# Altium PCB PCB1.PcbDoc
Units mm, origin at the board's own origin, x right, y up, seen from the top; angles counter-clockwise.
Board outline 223.9 x 171.83 mm, 2 copper layers (Top Layer, Bottom Layer); 83 components, 69 nets, 300 pads, 23 vias.
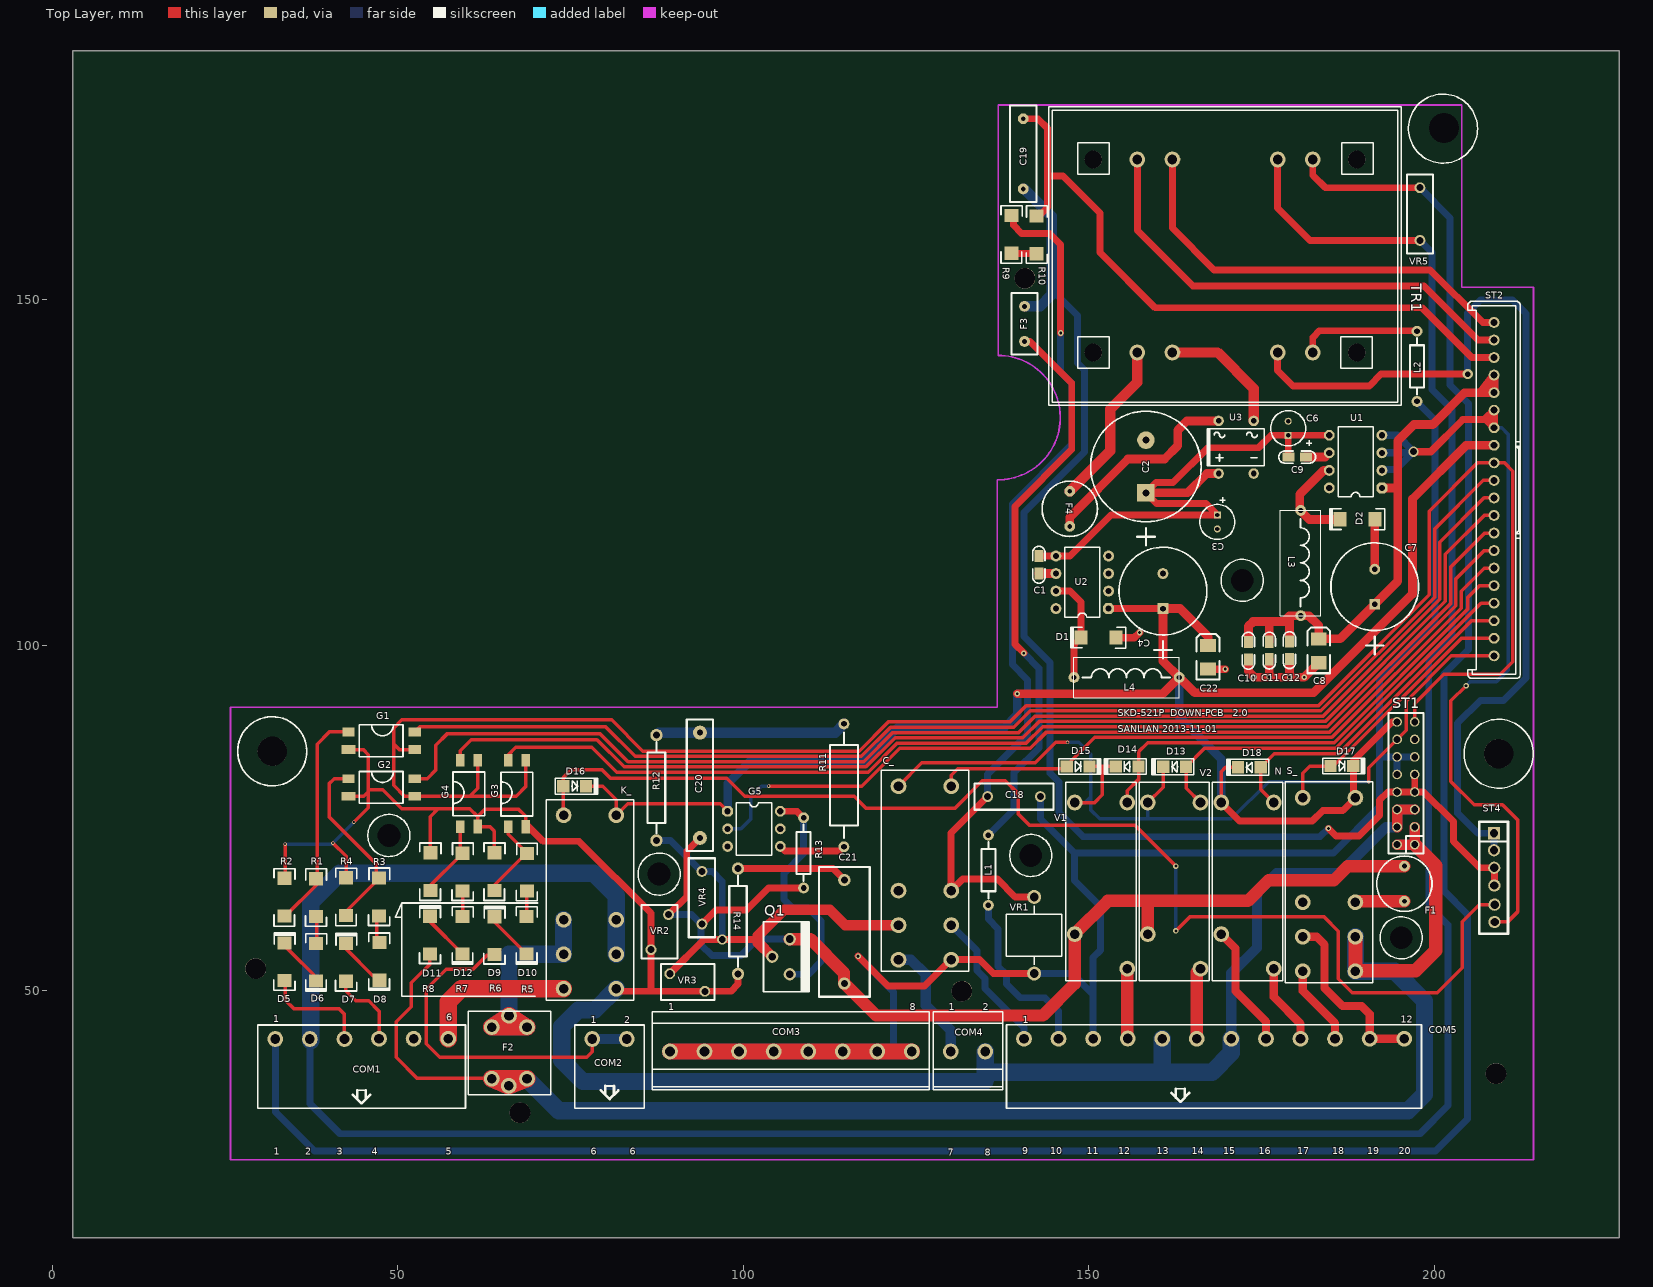
[diagram p0: Top Layer view]
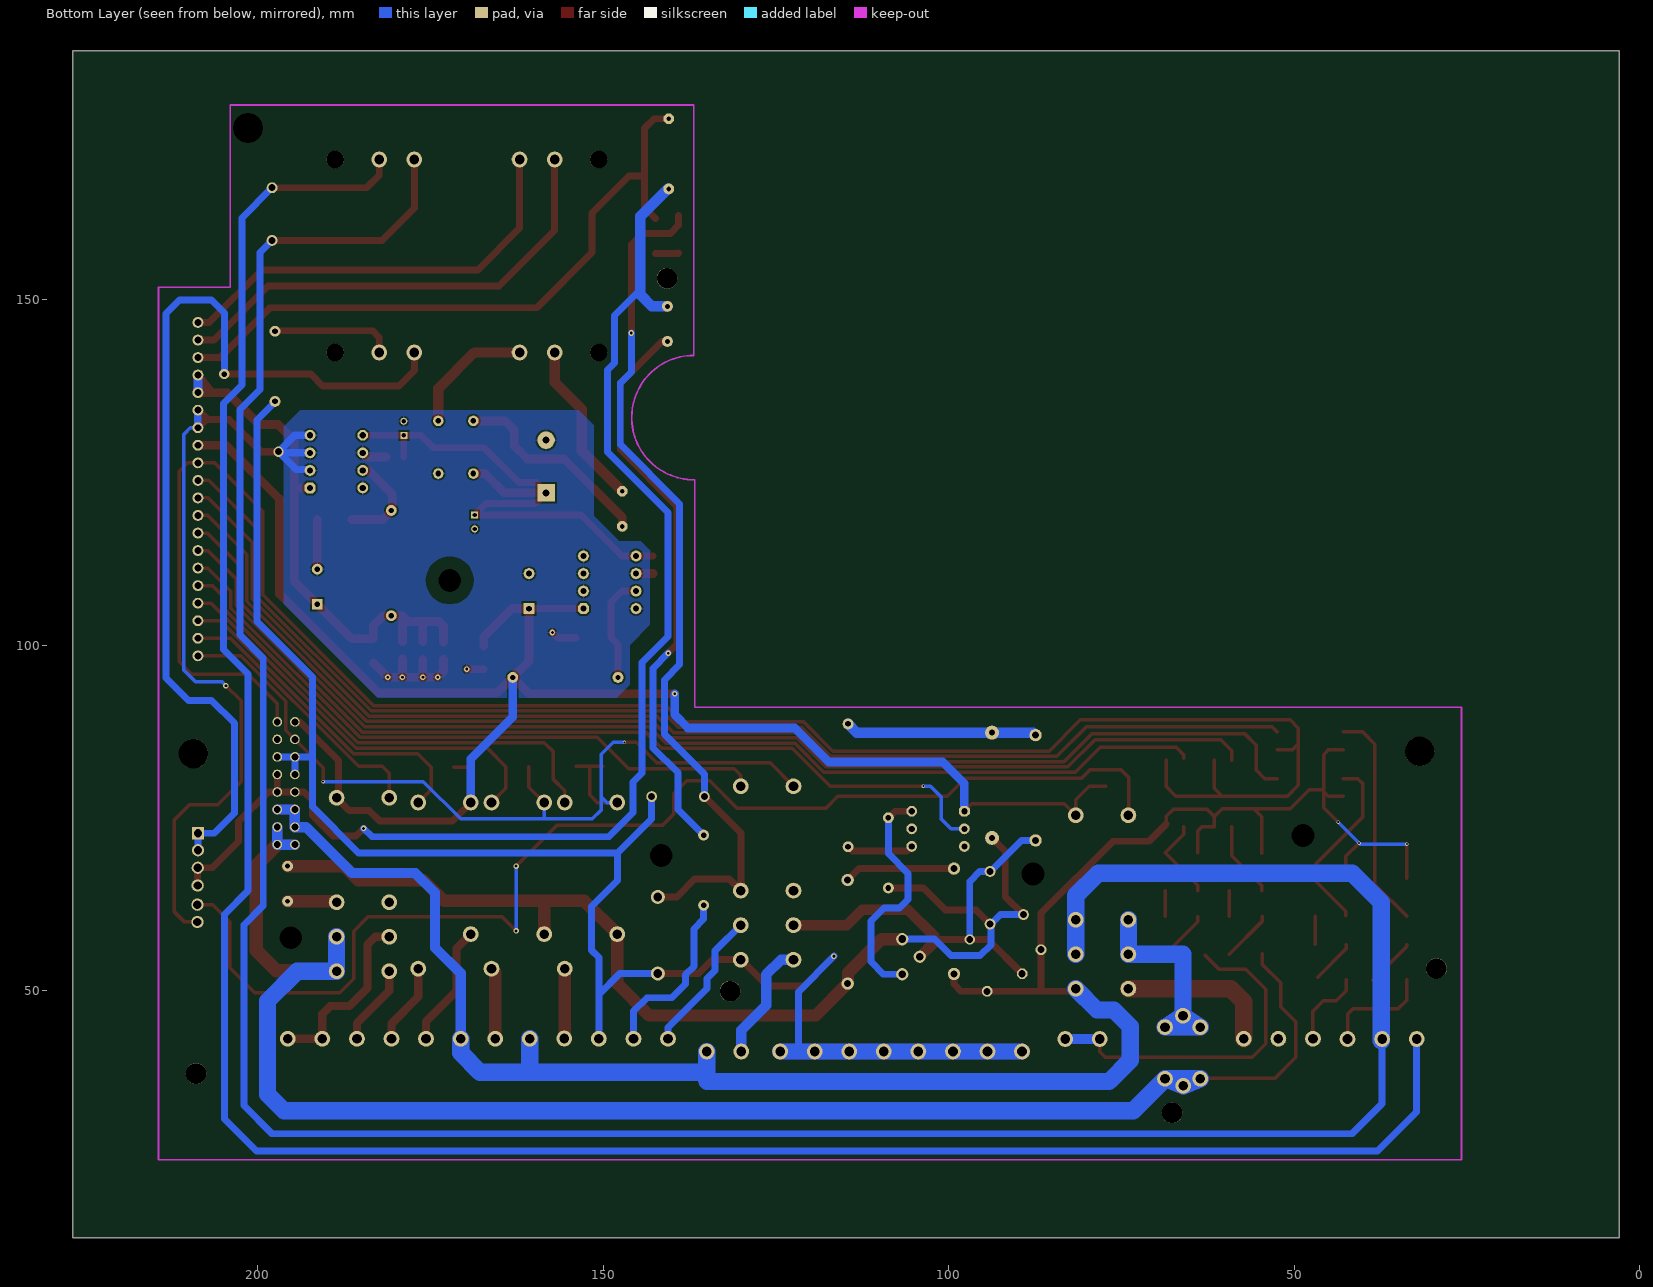
[diagram p1: Bottom Layer view, seen from below]

## Layer stack, top to bottom
Top Layer: signal copper 0.0356
Dielectric: dielectric 0.32, FR-4, Dk 4.8
Bottom Layer: signal copper 0.0356

## Board outline
226.822,186.055 226.822,14.224 2.921,14.224 2.921,186.055 226.822,186.055

## Design rules (kind name [scope] priority, off if disabled: settings)
Clearance [All] p1: gap=0.254
ComponentClearance [All] p1: gap=0.254 collisioncheckmode=3 verticalgap=0.254
HoleSize [All] p1: absolutevalues=TRUE maxlimit=6.54 minlimit=0.3 maxpercent=80.000 minpercent=20.000
PolygonConnect [All] p1: connectstyle=Relief reliefconductorwidth=0.254 reliefentries=4 polygonreliefangle="90 Angle"
RoutingVias [All] p1: holewidth=6.711 width=1.27 viastyle="Through Hole" minholewidth=0.3 minwidth=0.5 maxholewidth=6 maxwidth=6
SolderMaskExpansion [All] p1: expansion=0.102
TestPointUsage [All] p1: valid=0 allowmultiple=FALSE
Testpoint [All] p1: side=15 testpointundercomponent=TRUE minsize=1.016 maxsize=2.54 preferedsize=1.524 minholesize=0 maxholesize=1.016 preferedholesize=0.813 testpointgrid=0.025 style=1023 order=0123456789
Width [All] p1: maxlimit=6.254 minlimit=0.254 preferedwidth=0.254
17 further rules are at their usual default settings.

## Components (designator, comment, footprint, x,y, rotation, side; value= is the part's Value field where it differs from the comment)
C1 "104" 0805-B 142.799,112.903 r270 top
C2 "1000uF/50V" "RB.3/.6 - 16×25" 158.293,122.047 r270 top
C3 "22uF/63V" RB.1/.2-5*5 168.631,118.847 r270 top
C4 "220uF/63V" "RB.2/.4 - 12.5×25" 160.757,105.283 r270 top
C6 "22uF/63V" RB.1/.2-5*5 178.892,130.378 r90 top
C7 "470uF/35V" "RB.2/.4 - 12.5×25" 191.414,105.918 r270 top
C8 "10uF/25V" CT 183.363,99.212 r90 top
C9 "104" 0805-b 178.918,127.229 r0 top
C10 "104" 0805-b 173.126,100.457 r270 top
C11 "104" 0805-b 176.149,100.482 r270 top
C12 "104" 0805-b 179.07,100.533 r270 top
C18 "0.47nF/440V" RAD0.3 135.382,78.08 r0 top
C19 "33nF/400V" RAD0.4 140.538,176.2 r270 top
C20 "10nF/305V~" RAD0.6 93.726,87.325 r270 top
C21 "150nF/630V" RAD-0.47/250V 114.63,65.989 r270 top
C22 "10uF/25V" CT 167.335,98.298 r90 top
C_ "RT424012" RT424012 122.479,79.578 r270 top
COM1 "MDSTB 2.5/6-G" "MDSTB 2.5/6-G" 29.743,52.984 r0 top
COM2 "MSTB 2.5/2-G" "MSTB 2.5/2-G" 78.13,42.977 r0 top
COM3 "MKDS 3/2 (4只2位拼接)" "MKDS 3/8" 89.383,41.173 r0 top
COM4 "MKDS 3/2" "MKDS 3/2" 130.023,41.173 r0 top
COM5 "MSTB 2.5/12-G" "MSTB 2.5/12-G" 140.64,43.002 r0 top
D1 "1N5819" XD 151.359,101.092 r180 top
D2 "1N5819" XD 188.849,118.237 r180 top
D5 "GP10Y" XXD 33.579,54.178 r90 top
D6 "BZY97C100GP" XXD 38.151,54.077 r270 top
D7 "GP10Y" XXD 42.52,54.077 r90 top
D8 "BZY97C100GP" XXD 47.295,54.204 r270 top
D9 "GP10Y" XXD 63.983,57.963 r90 top
D10 "BZY97C100GP" XXD 68.631,57.988 r270 top
D11 "GP10Y" XXD 54.661,58.039 r90 top
D12 "BZY97C100GP" XXD 59.36,57.988 r270 top
D13 "FR107" D 162.535,82.372 r0 top
D14 "FR107" D 155.651,82.398 r0 top
D15 "FR107" D 148.387,82.448 r180 top
D16 "FR107" D 75.514,79.604 r180 top
D17 "FR107" D 186.588,82.525 r180 top
D18 "FR107" D 173.355,82.296 r0 top
F1 "5A/250V" RAD0.2 195.707,62.916 r90 top
F2 "3.5A/250V" FUSE_FPG4 63.602,44.704 r0 top
F3 "PTC C886" RAD0.2 140.716,143.967 r90 top
F4 "MST.630mA/250V" RAD0.2 147.269,117.196 r90 top
G1 "SFH615A-3" GG 47.676,86.157 r270 top
G2 "SFH615A-3" GG 47.676,79.4 r270 top
G3 "SFH615A-3" GG 67.234,78.537 r0 top
G4 "SFH615A-3" GG 60.274,78.562 r0 top
G5 "BRT12-H" DIP-6 97.739,75.946 r0 top
K_ "RT424012" RT424012 73.99,75.362 r270 top
L1 "5.6uH" AXIAL0.4 135.484,62.332 r90 top
L2 "5.6uH" AXIAL0.4 197.536,135.28 r90 top
L3 "330uH" LR 180.696,111.887 r270 top
L4 "1mH" LR 155.499,95.326 r0 top
N "V23061-A1005-A302" V23061-A1005-A302 169.189,77.216 r270 top
Q1 "BTB12-800CW" TO-220F 106.731,54.889 r270 top
R1 "33K/0.5W" TTR 38.151,63.449 r90 top
R2 "1K" TTR 33.553,63.5 r270 top
R3 "33K/0.5W" TTR 47.295,63.551 r90 top
R4 "1K" TTR 42.494,63.576 r270 top
R5 "33K/0.5W" TTR 68.682,67.132 r90 top
R6 "1K" TTR 63.957,67.208 r270 top
R7 "33K/0.5W" TTR 59.385,67.158 r90 top
R8 "1K" TTR 54.686,67.208 r270 top
R9 "470K" TTR 138.836,159.461 r270 top
R10 "470K" TTR 142.494,159.41 r90 top
R11 "820R/3W" AXIAL0.7 114.579,88.595 r270 top
R12 "220R/2W" AXIAL0.6 87.427,71.73 r90 top
R13 "1K" R 108.737,69.926 r180 top
R14 "680R/3W" AXIAL0.6 99.238,67.64 r270 top
S_ "RT424012" RT424012 181,77.902 r270 top
ST1 "CON16" IDC16-A 197.206,71.12 r90 top
ST2 "CON20" STOCKO20V 208.686,100.482 r270 top
ST4 "CON6" 2.54-6 208.407,68.478 r270 top
TR1 "TRANS10" T15-F131 182.448,170.307 r0 top
U1 "LM2574N-3.3" DIP-8 192.456,122.758 r180 top
U2 "LM2574N-12" DIP-8 152.883,105.283 r180 top
U3 "DF10M" BRIGDE_RECTIFIER 168.808,132.461 r0 top
V1 "V23061-A1005-A302" V23061-A1005-A302 147.98,77.216 r270 top
V2 "V23061-A1005-A302" V23061-A1005-A302 158.572,77.216 r270 top
VR1 "EF2500X" EF2500X 142.113,63.551 r270 top
VR2 "7M/250V~" 07K275 87.909,58.445 r270 top
VR3 "7M/250V~" 07K275 91.897,51.156 r180 top
VR4 "10M/240V~" RAD0.3 94.005,59.614 r90 top
VR5 "10M/250V~" RAD0.3 197.968,158.598 r90 top

## Footprints (in the part's own frame and the unit in brackets; to place one, negate y for a bottom-side part, rotate by r counter-clockwise, add the part's x,y. Pads: shape width x height; smd on the part's side, far side on the other; paste and mask are expansions set on the pad)
2.54-6 [mil]
  rect 70x70 hole 48: 1(-169,11)
  round 70 hole 48: 2(-72,11) 3(28,12) 4(129,13) 5(238,14) 6(337,14)
  silkscreen extent -234,-74 405,93
07K275 [mil]
  round 62 hole 40: 1(-100,50) 2(100,-50)
  silkscreen extent -155,-105 150,100
0805-B [mil]
  rect 70x50 smd: 1(0,0) 2(100,0)
  silkscreen extent -55,-35 155,35
0805-b [mil]
  rect 70x50 smd: 1(0,0) 2(100,0)
  silkscreen extent -55,-35 155,35
AXIAL0.4 [mil]
  round 62 hole 32: 1(0,0) 2(400,0)
  silkscreen extent 40,-40 360,40
AXIAL0.6 [mil]
  round 70 hole 40: 1(0,0) 2(600,0)
  silkscreen extent 40,-50 560,50
AXIAL0.7 [mil]
  round 62 hole 32: 1(0,0) 2(700,0)
  silkscreen extent 50,-80 650,80
BRIGDE_RECTIFIER [mil]
  round 60 hole 32: 1(0,0) 2(0,-300) 3(200,0) 4(200,-300)
  silkscreen extent -65,-255 260,-45
CT [mil]
  rect 75x90 smd: 1(65.6,2.23) 2(-69.4,2.23)
  silkscreen extent -129,-63 131,67
D [mil]
  rect 70x70 smd: 1(61.81,0.74) 2(-68.19,0.74)
  silkscreen extent -133,-44 107,46
DIP-6 [mil]
  oct 62x62 hole 35: 1(0,0)
  round 62 hole 35: 2(0,-100) 3(0,-200) 4(300,-200) 5(300,-100) 6(300,0)
  silkscreen extent 50,-250 250,50
DIP-8 [mil]
  oct 62x62 hole 35: 1(0,0)
  round 62 hole 35: 2(0,-100) 3(0,-200) 4(0,-300) 5(300,-300) 6(300,-200) 7(300,-100) 8(300,0)
  silkscreen extent 50,-350 250,50
EF2500X [mil]
  round 80 hole 50: 1(0,0) 2(437,0)
  silkscreen extent 50,-158 386,158
FUSE_FPG4 [mil]
  round 90 hole 55: 1(0,0) 1(200,0) 2(0,-295) 2(200,-295)
  silkscreen extent -135,-385 335,90
GG [mm]
  rect 1.25x1.8 smd: 1(-1.27,-4.826) 3(1.27,4.774) 4(-1.27,4.774)
  rect 1.25x2 smd: 2(1.27,-4.826)
  silkscreen extent -2.3,-3.28 2.3,3.07
IDC16-A [mil]
  round 55 hole 39.37: 1(0,0) 2(0,100) 3(100,0) 4(100,100) 5(200,0) 6(200,100) 7(300,0) 8(300,100) 9(400,0) 10(400,100) 11(500,0) 12(500,100) 13(600,0) 14(600,100) 15(700,0) 16(700,100)
  silkscreen extent -50,-50 750,150
LR [mil]
  round 62 hole 30: 1(-300,0) 2(300,0)
  silkscreen extent -300,-115 300,115
"MDSTB 2.5/6-G" [mil]
  round 90 hole 55: 1(99,-394) 2(296,-394) 3(493,-394) 4(690,-392) 5(887,-393) 6(1084,-393)
  silkscreen extent -1,-789 1183,-314
"MKDS 3/2" [mil]
  round 90 hole 55: 1(0,0) 2(197,0)
  silkscreen extent -100,-217 296,225
"MKDS 3/8" [mil]
  round 90 hole 55: 1(0,0) 2(197,0) 3(394,0) 4(591,0) 5(788,0) 6(985,0) 7(1182,0) 8(1379,0)
  silkscreen extent -100,-217 1478,225
"MSTB 2.5/2-G" [mil]
  round 90 hole 55: 1(0,0) 2(197,0)
  silkscreen extent -100,-394 296,80
"MSTB 2.5/12-G" [mil]
  round 90 hole 55: 1(0,0) 2(197,0) 3(394,0) 4(591,2) 5(788,1) 6(985,1) 7(1182,0) 8(1379,0) 9(1576,0) 10(1773,0) 11(1970,0) 12(2167,0)
  silkscreen extent -100,-395 2265,80
R [mil]
  round 62 hole 32: 1(0,-200) 2(0,200)
  silkscreen extent -40,-160 40,160
RAD0.2 [mil]
  round 62 hole 28: 1(0,0) 2(200,0)
  silkscreen extent -57,-157 257,157
RAD0.3 [mil]
  round 62 hole 40: 1(0,0) 2(300,0)
  silkscreen extent -75,-75 375,75
RAD0.4 [mil]
  round 62 hole 28: 1(0,0) 2(400,0)
  silkscreen extent -75,-75 475,75
RAD0.6 [mil]
  round 80 hole 35: 1(0,0) 2(600,0)
  silkscreen extent -75,-75 675,75
RAD-0.47/250V [mil]
  round 70 hole 40: 1(0,0) 2(590,0)
  silkscreen extent -75,-145 665,145
RB.1/.2-5*5 [mil]
  rect 40x40 hole 25: 1(0,0)
  round 40 hole 25: 2(80,0)
  silkscreen extent -100,-100 140,100
"RB.2/.4 - 12.5×25" [mil]
  rect 62x62 hole 32: 1(0,0)
  round 62 hole 32: 2(-200,0)
  silkscreen extent -350,-250 285,250
"RB.3/.6 - 16×25" [mil]
  rect 100x100 hole 40: 1(0,0)
  round 100 hole 40: 2(-300,0)
  silkscreen extent -465,-315 300,315
RT424012 [mil]
  round 90 hole 55: 11(791.85,0) 12(595,0) 14(988.7,0) 21(791.85,300) 22(595,300) 24(988.7,300) A1(0,0) A2(0,300)
  silkscreen extent -90,-100 1055,400
STOCKO20V [mil]
  round 62 hole 39.37: 1(-1820,0) 2(-1720,0) 3(-1620,0) 4(-1520,0) 5(-1420,0) 6(-1320,0) 7(-1220,0) 8(-1120,0) 9(-1020,0) 10(-920,0) 11(-820,0) 12(-720,0) 13(-620,0) 14(-520,0) 15(-420,0) 16(-320,0) 17(-220,0) 18(-120,0) 19(-20,0) 20(80,0)
  silkscreen extent -1941,-150 209,150
T15-F131 [mil]
  round 100 hole 100 unplated: 0(-1250,-1100) 0(-1250,0) 0(250,-1100) 0(250,0)
  round 90 hole 55: 1(0,0) 3(-1000,0) 4(-800,0) 6(-200,0) 7(-1000,-1100) 8(-800,-1100) 11(-200,-1100) 12(0,-1100)
  silkscreen extent -1505,-1400 505,300
TO-220F [mil]
  round 70 hole 45: 1(-100,0) 2(0,-100) 3(100,0)
  silkscreen extent -200,-150 200,110
TTR [mil]
  rect 75x80 smd: 1(-107.93,0.6) 2(107.07,0.6)
  silkscreen extent -163,-59 165,61
V23061-A1005-A302 [mil]
  round 90 hole 55: 11(750,0) 14(946.85,300) A1(0,0) A2(0,300)
  silkscreen extent -115,-50 1015,350
XD [mil]
  rect 75x80 smd: 1(-102.94,0.6) 2(97.07,0.6)
  silkscreen extent -158,-59 155,61
XXD [mil]
  rect 75x80 smd: 1(-107.93,0.6) 2(107.07,0.6)
  silkscreen extent -163,-59 165,61

## Part data
C8 C22: library part ELECTRO1, "Electrolytic Capacitor"
C9 C10 C11 C12: library part CAP, "Capacitor"
D1 D2: library part "DIODE SCHOTTKY", "Schottky Diode"
D5 D7 D9 D11 D13 D14 D15 D16 D17 D18: library part DIODE, "Diode"
D6 D8 D10 D12: library part ZENER3, "Zener Diode"
L3 L4: library part INDUCTOR
Q1: library part TRIAC
R1 R2 R3 R4 R5 R6 R7 R8 R9 R10 R13: library part RES2

## Free pads (board coordinates)
  round 2.286 hole 1.397: 0(66.091,46.355) 1(66.04,36.195)
  round 3 hole 3: ""(29.413,53.162) ""(67.666,32.283) ""(131.648,49.911) ""(140.767,153.111) ""(208.966,37.948)
  round 4.2 hole 4.3: ""(31.801,84.633) ""(201.447,174.854) ""(209.351,84.282)
  round 2.3 hole 3.3: ""(48.692,72.441) ""(87.808,66.853) ""(141.63,69.545) ""(172.237,109.372) ""(195.25,57.633)

## Via types
v1: diameter 0.8, hole 0.4, Top Layer to Bottom Layer, 13 vias
v2: diameter 0.5, hole 0.3, Top Layer to Bottom Layer, 6 vias
v3: diameter 1.5, hole 1, Top Layer to Bottom Layer, 2 vias
v4: diameter 1.5, hole 0.8, Top Layer to Bottom Layer, 1 vias
v5: diameter 0.8, hole 0.5, Top Layer to Bottom Layer, 1 vias

## Nets (pads, with @x,y where several pads share a name; then routed paths per layer and width w, separated by ;. In a path a pad name is that pad's centre, name@x,y a point inside that pad or via, vN(x,y) a via of type N, cw(c..) or ccw(c..) an arc to the next point about the centre after c; other vN are vias at no path point)
3.3V: C7.1 C8.1 C10.1 C11.1 C12.1 L3.2 ST2.4 ST2.5 U1.1 | length 86.1
  Top Layer w1.27: C10.1 173.126,102.718 173.812,103.403 178.206,103.403 179.07,104.267 ; C11.1 176.149,103.073 ; C12.1 179.07,104.267 ; U1.1 194.742,122.758 ; 206.791,136.621 ST2.4 ST2.5 ; 207.01,136.906 ST2.5 ; 179.07,104.267 181.889,104.267 183.306,102.85 183.306,100.94 186.436,100.94 194.742,109.245 194.742,129.591 197.079,131.928 199.796,131.928 204.419,136.55 ST2.5
  Bottom Layer w1.27: ST2.5 ST2.4
12V: C4.1 C22.1 D16.2 D17.2 D18.2 G5.1 K_.A2 L4.2 N.A1 S_.A2 ST1.16 ST2.8 U2.1 | length 264.1
  Top Layer w0.508: D16.2 79.648,79.585 81.61,77.622 K_.A2 83.287,77.038 96.647,77.038 G5.1 ; N.A1 169.189,81.686 169.818,82.315 D18.2 ; S_.A2@188.32,78.202 S_.A2
  Top Layer w1: U2.1 C4.1 ; N.A1 171.856,74.549 182.372,74.549 183.896,76.073 186.792,76.073 S_.A2 ; S_.A2@188.32,78.202 188.32,83.317 193.904,88.9 ST1.16
  Top Layer w1.27: v1(139.675,92.964) 160.731,92.964 L4.2@163.119,95.352 ; C22.1@167.329,99.822 167.329,101.225 163.271,105.283 C4.1 160.757,97.688 L4.2 L4.2@163.119,95.352 ; ST2.8 204.648,128.93 196.875,121.158 196.875,107.417 182.55,93.091 165.379,93.091 L4.2@163.119,95.352
  Bottom Layer w1.27: G5.1 97.739,79.959 100.863,83.083 117.348,83.083 122.276,88.011 137.744,88.011 139.675,89.941 v1(139.675,92.964) ; L4.2 163.119,89.586 169.189,83.515 N.A1
21V: C1.1 C2.1 C3.1 C6.1 C9.1 U1.5 U2.5 U3.2 | length 84.7
  Top Layer w1: C1.1 147.32,112.903 153.264,118.847 C3.1 166.98,120.498 159.842,120.498 C2.1 159.766,123.52 162.23,123.52 167.284,128.575 174.574,128.575 176.378,130.378 U1.5 ; C9.1@178.892,127.254 C6.1
  Top Layer w1.27: C2.1 164.338,122.047 167.132,124.841 U3.2
230L: ST4.1 ST4.2 TR1.11 | length 137.9
  Top Layer w1: TR1.11 177.368,139.751 179.578,137.541 190.627,137.541 192.329,139.243 v4(204.876,139.243)
  Bottom Layer w1: v4@204.851,139.268 204.851,148.082 206.705,149.936 211.379,149.936 213.335,147.98 213.335,95.25 210.083,91.999 206.731,91.999 203.429,88.697 203.429,75.667 206.324,72.771 ST4.1 ST4.2
AC24L: ST2.2 TR1.3 | length 68.5
  Top Layer w1: TR1.3 157.048,160.045 165.075,152.019 198.552,152.019 206.4,144.17 ST2.2
AC24N: ST2.1 TR1.4 | length 62.1
  Top Layer w1: TR1.4 162.128,160.376 168.173,154.33 199.441,154.33 207.061,146.71 ST2.1
AC220_L: COM1.1 TR1.1 VR5.2 | length 346.5
  Top Layer w1: TR1.1 182.448,168.021 184.252,166.218 VR5.2
  Bottom Layer w1: COM1.1 32.258,32.436 37.922,26.772 200.228,26.772 204.826,31.369 204.826,61.036 201.422,64.44 201.422,95.809 204.978,99.365 204.978,135.001 202.336,137.643 202.336,161.849 VR5.2
AC220_L_P: D11.1 F2.2 pad.1 S_.21 S_.24 ST1.1 ST1.2 ST1.3 | length 261.1
  Top Layer w0.508: D11.1 54.646,53.807 51.943,51.105 51.943,47.65 49.759,45.466 49.759,40.31 52.807,37.262 63.221,37.262 F2.2@63.602,36.881
  Top Layer w1.5: ST1.2 ST1.1 ST1.3
  Top Layer w2: S_.24 S_.21 ; S_.24@188.689,52.857 197.333,52.857 200.254,55.778 200.254,68.072 ST1.1
  Top Layer w2.5: F2.2@63.602,37.211 68.682,37.211 pad.1 F2.2@63.602,37.211
  Bottom Layer w1.5: ST1.2 ST1.1 ST1.3
  Bottom Layer w2.5: F2.2@63.602,37.211 pad.1 F2.2@68.656,37.236 ; F2.2@63.611,37.232 63.602,37.236 F2.2@68.656,37.236 ; S_.21 S_.24 194.328,52.789 198.628,48.489 198.628,34.976 196.24,32.588 73.304,32.588 F2.2@68.656,37.236
AC220_N: COM1.2 K_.21 K_.22 TR1.6 VR5.1 | length 412.8
  Top Layer w1: TR1.6 177.368,163.297 182.067,158.598 VR5.1
  Bottom Layer w1: COM1.2 37.262,33.604 41.605,29.261 197.968,29.261 202.032,33.325 202.032,59.512 199.238,62.306 199.238,98.095 202.59,101.448 202.59,134.112 199.72,136.982 199.72,156.845 VR5.1
  Bottom Layer w2.54: COM1.2@37.389,42.748 37.389,62.789 41.605,67.005 78.359,67.005 81.61,63.754 K_.21
AC220_N_N: COM4.2 COM5.5 COM5.7 G1.2 G2.2 G3.2 G4.2 K_.24 R2.1 R4.1 R6.1 R8.1 R14.2 ST1.4 ST1.5 ST1.6 VR2.2 VR3.1 | length 315.3
  Top Layer w0.508: R2.1@33.66,66.242 v2(33.66,71.191) ; v2(40.589,71.349) 42.499,69.438 R4.1@42.499,66.318 ; G2.2 45.06,78.13 45.72,78.791 ; G1.2 44.958,84.887 45.72,84.125 45.72,76.479 v2(43.612,74.371) ; 45.72,79.07 47.828,79.07 50.571,76.327 60.401,76.327 61.544,75.184 ; R8.1@54.701,69.899 54.701,75.174 55.867,76.34 ; R6.1@63.972,69.925 63.972,73.086 63.322,73.736 G4.2 61.544,75.184 ; G3.2@68.504,74.143 68.504,75.209 67.462,76.251 62.611,76.251 61.544,75.184
  Top Layer w1: G3.2@68.504,74.143 71.044,71.603 76.225,71.603 86.639,61.189 86.639,50.013 86.512,49.886 ; K_.24 81.973,49.886 98.196,49.886 99.238,50.927 R14.2
  Top Layer w1.5: ST1.4 ST1.6 ST1.5
  Bottom Layer w0.508: v2(33.66,71.191) 40.432,71.191 v2(43.612,74.371)
  Bottom Layer w1.5: COM5.7 170.663,52.476 174.371,56.185 174.371,64.16 177.216,67.005 186.385,67.005 193.04,73.66 ST1.4 ST1.6 ; ST1.6@194.691,76.2 ST1.5
  Bottom Layer w2.5: K_.24 78.529,47.168 76.098,47.168 73.711,44.78 73.711,39.903 76.784,36.83 134.976,36.83 ; 134.823,36.83 135.026,37.033 COM4.2 ; 135.026,38.176 167.869,38.176 170.663,40.97 COM5.7 ; 160.655,39.7 COM5.5
AC230V_L: C19.2 F3.2 ST1.7 ST1.8 ST1.9 ST4.3 ST4.4 | length 185.9
  Top Layer w1: v1(184.709,73.457) 185.826,72.339 189.128,72.339 192.126,75.336 192.126,77.546 193.319,78.74 198.501,78.74 202.794,74.447 202.794,71.603 206.629,67.767 ST4.3 208.737,67.742 ST4.4 ; ST1.7 ST1.9
  Top Layer w1.5: ST4.4 ST4.4@208.737,65.325
  Bottom Layer w1: 144.628,151.46 148.387,147.701 148.387,140.868 149.403,139.852 149.403,127.94 140.665,119.202 140.665,101.244 144.399,97.511 144.399,81.458 145.694,80.162 145.694,75.743 149.174,72.263 183.515,72.263 v1(184.709,73.457)
  Bottom Layer w1.524: C19.2@140.602,166.103 144.628,162.077 144.628,150.698 142.977,149.047 F3.2
AC230V_N: L2.2 TR1.12 | length 17.7
  Top Layer w1: TR1.12 182.448,144.551 183.413,145.517 L2.2@197.536,145.517
COM-3#: COM1.3 D5.1 | length 16
  Top Layer w0.508: D5.1@33.716,51.564 33.716,48.605 34.95,47.371 41.478,47.371 42.266,46.584 COM1.3
COM-4#: COM1.4 D7.1 | length 11.6
  Top Layer w0.508: D7.1@42.428,51.538 42.428,49.977 43.891,48.514 45.771,48.514 47.269,47.015 COM1.4
COM-5#: COM1.6 K_.14 | length 22.9
  Top Layer w2.5: 67.252,50.249 K_.14
  Top Layer w2.54: COM1.6 57.277,48.362 59.164,50.249 67.252,50.249
COM-6#: COM2.1 COM2.2 D9.1 | length 50.7
  Top Layer w0.508: 62.875,55.069 60.867,53.061 56.998,53.061 54.127,50.19 54.127,42.266 56.058,40.335 77.318,40.335 78.13,41.148 COM2.1
  Bottom Layer w1.5: COM2.1 COM2.2
COM-7#: C_.14 COM4.1 | length 17.5
  Bottom Layer w1.5: C_.14 124.275,54.465 126.416,52.324 126.416,47.854 130.023,44.247 COM4.1
COM-9#: C_.21 COM5.1 | length 20.8
  Bottom Layer w1: C_.21 133.807,55.757 133.807,52.908 135.001,51.714 135.001,50.267 140.64,44.628 COM5.1
COM-10#: COM5.2 L1.1 | length 25.7
  Bottom Layer w1: L1.1 135.484,60.35 136.906,58.928 136.906,53.467 138.087,52.286 138.087,50.965 140.106,48.946 143.713,48.946 145.644,47.015 COM5.2
COM-11#: C18.2 C_.24 COM3.1 COM3.2 COM3.3 COM3.4 COM3.5 COM3.6 COM3.7 COM3.8 COM5.3 L2.1 ST1.10 ST1.11 ST1.12 VR1.2 | length 282.3
  Top Layer w1: v5(116.611,54.966) 120.955,50.622 126.256,50.622 C_.24 134.181,54.465 136.195,52.451 VR1.2
  Top Layer w2.286: COM3.1 COM3.8
  Bottom Layer w1: v5(116.611,54.966) 121.768,49.809 121.768,41.173 ; VR1.2 147.625,52.451 150.647,49.428 ; C18.2@143.015,78.092 143.015,74.841 147.955,69.901 ; COM5.3 150.647,54.788 151.689,55.829 151.689,62.179 147.955,65.913 147.955,69.901 ; 192.176,83.82 ST1.11@197.307,83.82 ; ST1.10 ST1.12 ; L2.1@197.485,135.28 200.152,132.613 200.152,103.403 192.126,95.377 192.126,76.606 185.42,69.901 147.955,69.901
  Bottom Layer w2.286: COM3.1 COM3.8
COM-12#: COM5.4 V1.14 | length 10.2
  Top Layer w1.8: COM5.4@155.6,42.977 V1.14
COM-14#: COM5.6 V2.14 | length 10.4
  Top Layer w1.8: COM5.6 165.659,52.633 V2.14
COM-16#: COM5.8 N.11 | length 17.8
  Top Layer w1.2: N.11 171.247,56.109 171.247,49.936 175.666,45.517 COM5.8
COM-17#: COM5.9 N.14 | length 11.8
  Top Layer w1.2: N.14 176.809,49.047 180.67,45.187 COM5.9
COM-18#: COM5.10 S_.14 | length 11.7
  Top Layer w1.2: S_.14 181,49.936 185.674,45.263 COM5.10
COM-19#: COM5.11 COM5.12 S_.11 | length 26.6
  Top Layer w1.2: S_.11 183.003,57.789 184.15,56.642 184.15,50.343 186.741,47.752 189.535,47.752 190.678,46.609 COM5.11 COM5.12
GND: C1.2 C2.2 C3.2 C4.2 C6.2 C7.2 C8.2 C9.2 C10.2 C11.2 C12.2 C22.2 D1.1 D2.1 ST2.6 ST2.7 ST4.6 U1.2 U1.3 U1.4 U1.6 U1.8 U2.2 U2.3 U2.4 U2.6 U2.8 U3.4 | length 162
  Top Layer w0.508: v1(204.648,94.132) 202.438,91.923 202.438,80.264 205.816,76.886 209.906,76.886 212.09,74.701 212.09,61.366 210.642,59.919 ST4.6
  Top Layer w1.08: D1.1 156.627,101.077 v1(157.378,101.829) ; C22.2 v1(169.789,96.535) ; v3(197.028,128.016) 199.542,128.016 204.191,132.664 207.493,132.664 ST2.7 ST2.6 207.493,132.817
  Top Layer w1.27: C1.2 U2.6 ; C10.2 173.126,96.215 v1(173.99,95.352) v1(181.208,95.352) C8.2 ; v1@176.149,95.352 C11.2 ; v1@179.07,95.352 C12.2 ; C9.2 184.226,127.229 U1.6 ; C7.2 D2.1@191.414,118.222
  Bottom Layer w0.508: v1(204.648,94.132) 205.207,94.691 209.042,94.691 210.718,96.368 210.718,130.556 209.804,131.47 ST2.7
  Bottom Layer w1.08: U1.2@192.456,125.425 194.462,125.425 197.028,127.991 v3(197.028,128.016) 194.666,130.378 U1.4 ; U1.3 v3@196.875,127.838 ; ST2.7 ST2.6
  other v1: 176.124,95.352 179.095,95.352
J1-1#: G2.4 ST2.11 | length 183.4
  Top Layer w0.508: G2.4 54.254,80.67 55.499,81.915 55.499,85.522 57.175,87.198 79.248,87.198 83.317,83.129 117.431,83.129 121.647,87.346 139.859,87.346 142.226,89.713 183.933,89.713 200.844,106.624 200.844,114.916 207.239,121.31 ST2.11
J1-2#: G1.4 ST2.10 | length 180.7
  Top Layer w0.508: G1.4 53.237,88.214 80.035,88.214 84.357,83.892 117.101,83.892 121.317,88.108 139.162,88.108 141.534,90.48 183.616,90.48 200.082,106.946 200.082,116.821 207.112,123.85 ST2.10
J1-3#: D18.1 N.A2 ST2.18 | length 48.4
  Top Layer w0.508: N.A2 174.925,79.1 D18.1 176.887,84.277 186.173,84.277 205.426,103.53 ST2.18
J1-5#: C19.1 R10.2 ST2.3 | length 96.7
  Top Layer w1: C19.1 142.646,176.2 144.018,174.828 144.018,163.347 R10.2@142.443,161.773 ; 144.018,167.894 146.304,167.894 151.663,162.535 151.663,156.82 159.639,148.844 198.247,148.844 205.461,141.63 ST2.3
J1-9#: G3.4 ST2.13 | length 162.6
  Top Layer w0.508: G3.4@65.964,83.591 65.964,84.099 67.081,85.217 78.054,85.217 81.666,81.605 118.091,81.605 122.308,85.822 140.991,85.822 143.353,88.184 184.563,88.184 202.394,106.015 202.394,111.259 207.366,116.23 ST2.13
J1-10#: G4.4 ST2.12 | length 172.4
  Top Layer w0.508: G4.4 59.004,84.684 60.63,86.309 78.816,86.309 82.758,82.367 117.761,82.367 121.977,86.584 140.483,86.584 142.845,88.946 184.244,88.946 201.625,106.328 201.625,113.132 207.264,118.77 ST2.12
J1-11#: C_.A2 D15.1 ST2.15 | length 94
  Top Layer w0.508: C_.A2 130.099,81.178 131.039,82.118 146.329,82.118 150.871,86.66 185.223,86.66 203.918,105.354 203.918,107.804 207.264,111.15 ST2.15
J1-12#: G5.2 ST2.14 | length 131.8
  Top Layer w0.508: v2(103.657,79.578) 117.145,79.578 122.626,85.06 141.535,85.06 143.898,87.422 184.893,87.422 203.156,105.685 203.156,109.582 207.264,113.69 ST2.14
  Bottom Layer w0.508: G5.2 99.67,73.406 101.117,74.854 101.117,78.054 102.641,79.578 v2(103.657,79.578)
J1-13#: C_.A1 D13.2 D14.2 D15.2 ST1.14 ST2.20 V1.A1 V2.A1 | length 135.1
  Top Layer w0.508: C_.A1 125.857,82.956 142.291,82.956 145.263,85.928 v2(146.939,85.928) ; V1.A1 150.876,77.216 151.994,78.334 151.994,82.43 ; D15.2 D14.2@153.906,82.43 ; V2.A1 160.803,79.446 D13.2 ; v2(190.576,80.239) 190.576,82.271 195.961,87.655 195.961,91.897 202.514,98.45 ST2.20
  Bottom Layer w0.508: C_.A1@122.631,79.832 C_.A1@122.631,79.858 ; v2(146.939,85.928) 148.565,85.928 150.317,84.176 150.317,76.124 151.587,74.854 170.663,74.854 176.047,80.239 v2(190.576,80.239) ; V1.A1 149.504,77.216 150.317,78.029 ; 158.572,74.854 V2.A1
J1-14#: G1.3 G2.3 G3.3 G4.3 ST1.15 ST2.9 | length 277.7
  Top Layer w0.508: 49.378,85.7 50.19,84.887 G1.3 ; 60.401,78.13 61.544,79.273 G4.3 ; G3.3 68.504,79.527 67.107,78.13 50.952,78.13 49.378,79.705 49.378,87.986 50.571,89.179 80.95,89.179 85.471,84.658 116.775,84.658 120.992,88.875 138.557,88.875 140.932,91.249 183.285,91.249 199.314,107.278 199.314,119.405 206.299,126.39 210.21,126.39 211.404,125.197 211.404,97.587 209.575,95.758 201.422,95.758 197.206,91.542 ST1.15
J1-15#: D17.1 S_.A1 ST2.19 | length 39.3
  Top Layer w0.508: S_.A1 181,81.432 182.016,82.448 185.431,82.448 203.973,100.99 ST2.19
J1-16#: D14.1 ST2.16 V1.A2 | length 70.4
  Top Layer w0.508: V1.A2 155.6,78.918 157.221,80.539 157.221,84.552 158.547,85.877 185.533,85.877 204.851,105.195 204.851,106.883 206.578,108.61 ST2.16
J1-17#: D13.1 ST2.17 V2.A2 | length 60.4
  Top Layer w0.508: V2.A2 164.105,79.304 D13.1 166.773,85.06 185.796,85.06 206.807,106.07 ST2.17
KEY_OUT: D16.1 K_.A1 ST4.5 | length 179.6
  Top Layer w0.508: K_.A1 73.944,75.408 73.944,80.828 75.057,81.94 79.553,81.94 80.772,80.721 97.612,80.721 100.228,78.105 116.053,78.105 117.805,76.352 130.632,76.352 134.62,80.34 137.947,80.34 139.776,78.511 139.776,75.59 141.478,73.889 156.769,73.889 v1(162.636,68.021) ; v1(162.636,58.623) 164.668,60.655 184.074,60.655 186.131,58.598 186.131,51.689 188.138,49.682 200.482,49.682 204.089,53.289 204.089,59.969 206.553,62.433 ST4.5
  Bottom Layer w0.508: v1(162.636,58.623) v1(162.636,68.021)
NetC18_1: C18.1 C_.22 R9.1 VR1.1 | length 126.4
  Top Layer w1: C18.1 130.099,72.796 C_.22 131.775,66.142 136.779,66.142 139.37,63.551 VR1.1 ; R9.1@139.106,162.203 139.106,160.792 140.284,159.614 144.323,159.614 145.948,157.988 v1(145.948,145.186)
  Bottom Layer w1: C18.1 135.382,81.305 141.173,87.097 141.173,94.971 138.963,97.18 138.963,120.447 147.549,129.032 147.549,137.922 145.948,139.522 v1(145.948,145.186)
NetC20_1: C20.1 R11.1 R12.2 | length 27.8
  Bottom Layer w1.524: R12.2 87.782,87.325 113.309,87.325 R11.1
NetC20_2: C20.2 C21.2 F1.2 Q1.1 R13.2 V1.11 V2.11 VR2.1 VR4.1 | length 164.7
  Top Layer w1: VR2.1 91.821,63.627 91.821,70.18 C20.2 ; VR4.1 96.063,61.671 100.457,61.671 103.632,64.846 R13.2
  Top Layer w1.8: Q1.1 109.703,57.429 114.579,52.553 C21.2@114.579,51.384 ; C21.2 119.253,46.38 143.383,46.38 147.98,50.978 V1.11 152.781,62.967 173.05,62.967 176.047,65.964 185.496,65.964 187.528,67.996 F1.2 ; V2.11 158.572,62.865 158.674,62.967
  Bottom Layer w1: VR2.1 92.532,60.985 93.904,59.614 93.904,56.591 95.453,55.042 99.695,55.042 102.083,57.429 Q1.1
NetC21_1: C21.1 R14.1 | length 16.1
  Top Layer w1: R14.1 112.979,67.64 C21.1
NetC__11: C_.11 Q1.2 R12.1 VR3.2 VR4.2 | length 61.9
  Top Layer w1: VR3.2 94.31,57.379 102.133,57.379
  Top Layer w1.524: Q1.2 102.133,56.947 102.133,57.912 105.918,61.697 112.547,61.697 114.779,59.465 C_.11
  Bottom Layer w1: R12.1 89.484,71.73 93.98,67.234 95.529,67.234 96.952,65.811 v3(96.952,57.379)
NetD1_2: D1.2 L4.1 U2.7 | length 15.6
  Top Layer w1: U2.7 147.295,107.823 148.893,106.224 D1.2 147.879,100.062 L4.1
NetD2_2: D2.2 L3.1 U1.7 | length 14.3
  Top Layer w1.27: U1.7 184.048,125.298 180.569,121.818 180.569,119.558 181.93,118.196 D2.2@186.384,118.196
NetD5_2: D5.2 D6.2 | length 7.2
  Top Layer w0.508: D5.2@33.716,56.644 33.716,56.378 D6.2@38.608,51.486
NetD6_1: D6.1 R1.1 | length 4.1
  Top Layer w0.508: D6.1@38.242,56.691 R1.1@38.242,60.782
NetD7_2: D7.2 D8.2 | length 6.4
  Top Layer w0.508: D7.2@42.428,56.618 42.428,56.073 D8.2@46.584,51.918
NetD8_1: D8.1 R3.1 | length 4
  Top Layer w0.508: D8.1@46.929,56.691 R3.1@46.929,60.716
NetD9_2: D9.2 D10.2 | length 7.4
  Top Layer w0.508: D9.2 63.967,59.947 D10.2
NetD10_1: D10.1 R5.1 | length 3.7
  Top Layer w0.508: D10.1 R5.1@68.646,64.446
NetD11_2: D11.2 D12.2 | length 7.4
  Top Layer w0.508: D11.2 54.646,59.998 D12.2
NetD12_1: D12.1 R7.1 | length 3.7
  Top Layer w0.508: D12.1 R7.1@59.375,64.411
NetF1_1: F1.1 S_.22 | length 7.1
  Top Layer w1.8: S_.22 188.747,62.916 F1.1
NetF2_1: F2.1 K_.11 K_.12 pad.0 | length 55.1
  Top Layer w2.5: F2.1@63.602,44.704 F2.1@68.682,44.704 ; F2.1@63.602,44.704 pad.0 ; F2.1@63.602,44.704 F2.1@68.682,44.704 ; F2.1@63.602,44.704 pad.0 ; pad.0 F2.1@68.682,44.704 ; pad.0 F2.1@68.682,44.704
  Bottom Layer w2.5: F2.1@68.605,44.704 pad.0 ; F2.1@68.682,44.704 63.602,44.704 pad.0 ; K_.12 K_.11 73.986,55.245 66.091,55.245 pad.0
NetF3_1: F3.1 L1.2 | length 82.6
  Top Layer w1: v1(140.614,98.831) 139.319,100.127 139.319,120.066 147.549,128.295 147.549,137.922 141.503,143.967 F3.1
  Bottom Layer w1: L1.2 139.217,76.225 139.217,81.534 142.799,85.115 142.799,96.647 v1(140.614,98.831)
NetF4_1: F4.1 U3.1 | length 30
  Top Layer w1.27: F4.1 147.269,118.516 155.702,126.949 160.985,126.949 162.89,128.854 162.89,131.115 164.236,132.461 U3.1
NetF4_2: F4.2 TR1.7 | length 24.2
  Top Layer w1.5: F4.2@147.269,122.25 153.137,128.118 153.137,134.137 157.048,138.049 TR1.7
NetG1_1: G1.1 R1.2 R2.2 | length 32.1
  Top Layer w0.508: R2.2@33.66,60.752 38.298,65.39 38.298,85.644 40.081,87.427 G1.1
NetG2_1: G2.1 R3.2 R4.2 | length 26.9
  Top Layer w0.508: R4.2@42.499,60.803 42.499,61.448 46.883,65.832 46.883,68.306 40.03,75.159 40.03,79.908 40.792,80.67 G2.1
NetG3_1: G3.1 R5.2 R6.2 | length 12.3
  Top Layer w0.508: R6.2@63.972,64.464 63.972,65.234 68.666,69.928 65.964,72.63 G3.1
NetG4_1: G4.1 R7.2 R8.2 | length 11.1
  Top Layer w0.508: R8.2@54.701,64.438 54.701,65.208 59.004,69.511 G4.1
NetG5_4: G5.4 R11.2 | length 9.8
  Top Layer w1: G5.4 106.045,70.18 113.944,70.18 R11.2
NetG5_6: G5.6 Q1.3 R13.1 | length 34.7
  Top Layer w1: G5.6 107.798,75.946 R13.1
  Bottom Layer w1: Q1.3 109.449,52.349 111.277,54.178 111.277,60.046 109.398,61.925 107.137,61.925 105.867,63.195 105.867,66.954 108.737,69.825 R13.1
NetR9_2: R9.2 R10.1 | length 3.4
  Top Layer w1: R9.2@139.106,156.742 139.153,156.694 R10.1@142.479,156.694
NetTR1_8: TR1.8 U3.3 | length 18.6
  Top Layer w1.5: TR1.8 168.656,142.367 173.888,137.135 U3.3
pads on no net: C_.12 COM1.5 G5.3 G5.5 S_.12 ST1.13 TR1.0

## Polygon pours and split planes (outlines as drawn)
GND on Bottom Layer "Top Layer-No Net" (solid, remove dead copper, pour order 1000): 147.676,115.037 144.602,115.037 143.154,113.589 143.256,113.487 143.256,102.946 146.186,100.016 146.186,94.276 148.082,92.38 182.677,92.38 196.291,105.994 196.291,126.349 196.291,131.597 193.904,133.985 153.543,133.985 151.359,131.801 151.359,118.72

## Keep-outs
Keep-Out Layer:
  lines w0.254: 136.777,123.949 ccw(c136.897,132.948) 136.906,141.948 136.906,178.202 137.389,178.202 204.013,178.202 204.013,151.816 214.401,151.816 214.401,25.502 25.781,25.502 25.781,91.002 136.779,91.002 136.779,123.949 ; 214.353,122.082 214.401,122.13

## Silkscreen, mask and mechanical layers (free items; w line width, h text height)
Top Overlay:
  circle w0.203: c201.295,174.777 r5
  circle w0.203: c172.237,109.372 r3.048
  circle w0.254: c31.801,84.633 r5
  circle w0.203: c209.372,84.277 r5
  circle w0.203: c87.808,66.853 r3.048
  circle w0.203: c48.692,72.441 r3.048
  circle w0.203: c141.63,69.545 r3.048
  circle w0.203: c195.25,57.633 r3.048
  lines w0.254: 50.507,60.59 49.612,60.59 50.546,62.662 ; 69.901,49.174 50.546,49.174 50.546,62.662 ; 70.256,62.662 50.546,62.662
  text "SKD-521P  DOWN-PCB   2.0" at 154.178,89.713 h1.02
  text "SANLIAN 2013-11-01" at 154.178,87.422 h1.02
  text "9" at 140.386,26.264 h1.02
  text "10" at 144.45,26.264 h1.02
  text "11" at 149.708,26.264 h1.02
  text "12" at 154.28,26.264 h1.02
  text "13" at 159.868,26.264 h1.02
  text "14" at 164.948,26.264 h1.02
  text "15" at 169.52,26.264 h1.02
  text "16" at 174.6,26.264 h1.02
  text "17" at 180.188,26.264 h1.02
  text "18" at 185.268,26.264 h1.02
  text "19" at 190.348,26.264 h1.02
  text "20" at 194.92,26.264 h1.02
  text "1" at 32.004,26.238 h1.02
  text "2" at 36.576,26.238 h1.02
  text "3" at 41.148,26.238 h1.02
  text "4" at 46.228,26.238 h1.02
  text "5" at 56.896,26.238 h1.02
  text "6" at 77.953,26.238 h1.02
  text "6" at 83.541,26.238 h1.02
  text "8" at 134.95,26.111 h1.02
  text "7" at 129.591,26.086 h1.02
Bottom Solder:
  lines w1.27: 208.686,131.47 208.686,134.01 ; 208.686,136.55 208.686,139.09
  lines w2.286: 89.383,41.173 124.409,41.173
  lines w2.5: 63.602,37.211 68.682,37.211 66.04,36.195 63.602,37.211 ; 63.602,44.704 68.682,44.704 66.091,46.355 63.602,44.704

## Text inside footprints (layer, text, board x,y; h text height)
COM1: Top Overlay "1" at 31.928,45.415 h1.02; Top Overlay "6" at 57.023,45.618 h1.02
COM2: Top Overlay "1" at 77.953,45.263 h1.02; Top Overlay "2" at 82.753,45.263 h1.02
COM3: Top Overlay "8" at 124.079,47.168 h1.02; Top Overlay "1" at 89.129,47.142 h1.02
COM4: Top Overlay "2" at 134.696,47.142 h1.02; Top Overlay "1" at 129.769,47.142 h1.02
COM5: Top Overlay "12" at 195.174,45.339 h1.02; Top Overlay "1" at 140.462,45.288 h1.02